# Altium PCB RF_Attenuator.PcbDoc
Units mm, origin at the board's own origin, x right, y up, seen from the top; angles counter-clockwise.
Board outline 49.66 x 26.8 mm, 2 copper layers (Top Layer, Bottom Layer); 25 components, 19 nets, 88 pads, 148 vias.
Unrouted connection lines stored in the file: 2.
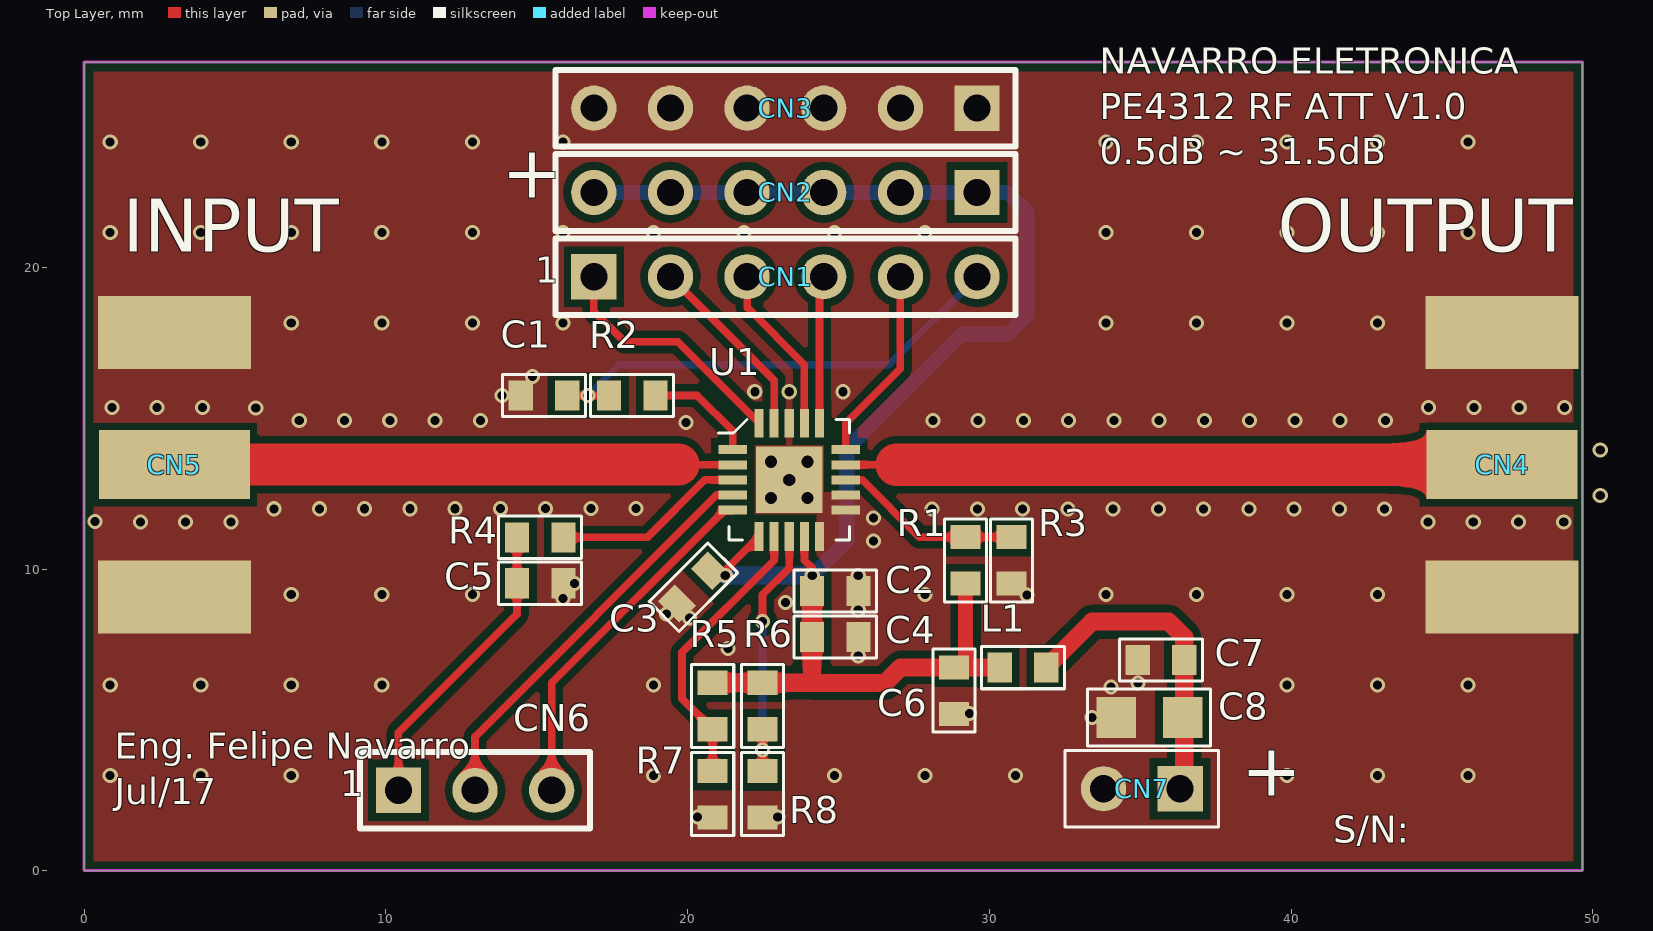
[diagram p0: Top Layer view]
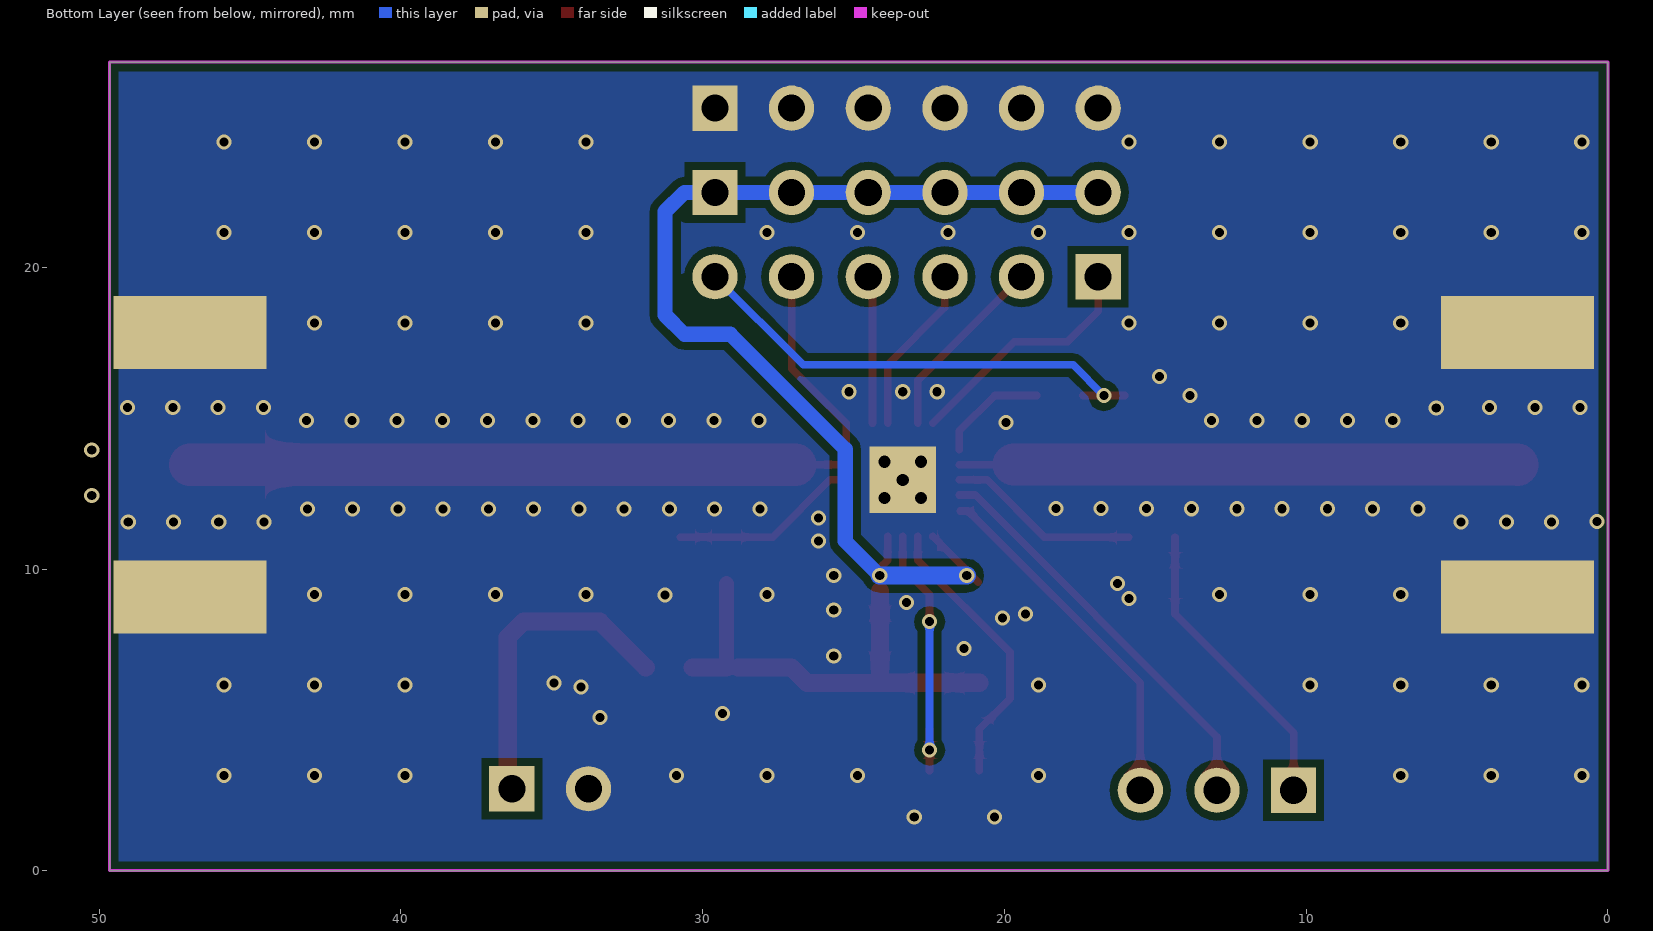
[diagram p1: Bottom Layer view, seen from below]

## Layer stack, top to bottom
Top Solder: solder mask 0.0102, Solder Resist, Dk 3.5
Top Layer: signal copper 0.0356
Dielectric 1: dielectric 0.32, FR-4, Dk 4.8
Bottom Layer: signal copper 0.0356
Bottom Solder: solder mask 0.0102, Solder Resist, Dk 3.5

## Board outline
0,0 0,26.797 49.657,26.797 49.657,0

## Design rules (kind name [scope] priority, off if disabled: settings)
Clearance "Schematic Clearance Constraint_1" [InNet('NetCN4_S')] p1: gap=0.25
Clearance "Schematic Clearance Constraint" [InNet('NetCN5_S')] p2: gap=0.25
Clearance [All] p3: gap=0.254
PolygonConnect [All] p1: connectstyle=Direct reliefconductorwidth=0.254 reliefentries=4 polygonreliefangle="90 Angle" airgapwidth=0.254
RoutingVias [All] p1: holewidth=0.711 width=1.27 viastyle="Through Hole" minholewidth=0.711 minwidth=1.27 maxholewidth=0.711 maxwidth=1.27
SolderMaskExpansion [All] p1: expansion=0.102
Width "Schematic Width Constraint_1" [InNet('NetCN4_S')] p1: maxlimit=1.4 minlimit=1.4 preferedwidth=1.4
Width "Schematic Width Constraint" [InNet('NetCN5_S')] p2: maxlimit=1.4 minlimit=1.4 preferedwidth=1.4
Width [All] p3: maxlimit=6 minlimit=0.254 preferedwidth=0.254
30 further rules are at their usual default settings.

## Components (designator, comment, footprint, x,y, rotation, side; value= is the part's Value field where it differs from the comment)
C1 "Capacitor Cerâmico" CC0603 15.24,15.748 r0 top
C2 "Capacitor Cerâmico" CC0603 24.892,9.271 r180 top
C3 "Capacitor Cerâmico" CC0603 20.193,9.398 r45 top
C4 "Capacitor Cerâmico" CC0603 24.892,7.747 r180 top
C5 "Capacitor Cerâmico" CC0603 15.113,9.525 r180 top
C6 "Capacitor Cerâmico" CC0603 28.829,5.969 r90 top
C7 "Capacitor Cerâmico" CC0603 35.687,6.985 r0 top
C8 "Capacitor Cerâmico" CC0805 35.306,5.08 r0 top
CN1 "Header 6" "CONN HDR1X6" 16.891,19.685 r0 top
CN2 "Header 6" "CONN HDR1X6" 29.591,22.479 r180 top
CN3 "Header 6" "CONN HDR1X6" 29.591,25.273 r180 top
CN4 "Conn SMA EDGE" "CONN SMA EDGE MOUNT" 49.99,13.457 r0 top
CN5 "Conn SMA EDGE" "CONN SMA EDGE MOUNT" -0.01,13.457 r180 top
CN6 "Header 3" "CONN HDR1X3" 10.414,2.667 r0 top
CN7 "Header 2" "CONN HDR1X2" 36.322,2.717 r180 top
L1 "Bead" CC0603 31.115,6.731 r0 top
R1 "Resistor" CC0603 29.21,10.287 r270 top
R2 "Resistor" CC0603 18.161,15.748 r180 top
R3 "Resistor Open" CC0603 30.734,10.287 r90 top
R4 "Resistor" CC0603 15.113,11.049 r0 top
R5 "Resistor" CC0603 20.828,5.461 r90 top
R6 "Resistor" CC0603 22.479,5.461 r90 top
R7 "Resistor Open" CC0603 20.828,2.54 r90 top
R8 "Resistor Open" CC0603 22.479,2.54 r90 top
U1 "PE4312" QFN4X4-20N 23.368,12.954 r0 top

## Footprints (in the part's own frame and the unit in brackets; to place one, negate y for a bottom-side part, rotate by r counter-clockwise, add the part's x,y. Pads: shape width x height; smd on the part's side, far side on the other; paste and mask are expansions set on the pad)
CC0603 [mm] "Chip Resistor, 2-Leads, Body 1,6x0,8mm, IPC Medium Density"
  rect 0.8x1 smd: 1(-0.77,0) 2(0.77,0)
  silkscreen extent -1.38,-0.7 1.38,0.7, body extent -0.8,-0.42 0.8,0.43, height 0.45
CC0805 [mm] "Chip Resistor, 2-Leads, Body 2,0x1,2mm, IPC Medium Density"
  rect 1.3x1.35 smd: 1(-1.1,0) 2(1.1,0)
  silkscreen extent -2.05,-0.95 2.02,0.95, body extent -1,-0.62 1,0.63, height 0.6
"CONN HDR1X2" [mm] "Connector; Header; 2 Position"
  rect 1.5x1.5 hole 0.9: 1(0,0)
  round 1.5 hole 0.9: 2(2.54,0)
  silkscreen extent -1.27,-1.27 3.81,1.27, body extent -1.27,-1.27 3.81,1.27, height 8.49
"CONN HDR1X3" [mm] "Connector; Header; 3 Position"
  rect 1.5x1.5 hole 0.9: 1(0,0)
  round 1.5 hole 0.9: 2(2.54,0) 3(5.08,0)
  silkscreen extent -1.27,-1.27 6.35,1.27, body extent -1.27,-1.27 6.35,1.27, height 8.49
"CONN HDR1X6" [mm] "Connector; Header; 6 Position"
  rect 1.5x1.5 hole 0.9: 1(0,0)
  round 1.5 hole 0.9: 2(2.54,0) 3(5.08,0) 4(7.62,0) 5(10.16,0) 6(12.7,0)
  silkscreen extent -1.27,-1.27 13.97,1.27, body extent -1.27,-1.27 13.97,1.27, height 8.51
"CONN SMA EDGE MOUNT" [mm]
  rect 5.08x2.415 smd: G(-3,-4.383) G(-3,4.383)
  rect 5.08x2.415 smd far side: G(-3,-4.383) G(-3,4.383)
  rect 5x2.29 smd: S(-3,0)
  body extent -5.14,-4.75 9.14,4.78, height 4.36
QFN4X4-20N [mm] "QFN, 20-Leads, Body 4,0x4,0mm (max), Pitch 0,50mm, IPC Medium Density"
  rect 0.95x0.3 smd: 1(-1.875,1) 2(-1.875,0.5) 3(-1.875,0) 4(-1.875,-0.5) 5(-1.875,-1) 11(1.875,-1) 12(1.875,-0.5) 13(1.875,0) 14(1.875,0.5) 15(1.875,1)
  rect 0.3x0.95 smd: 6(-1,-1.875) 7(-0.5,-1.875) 8(0,-1.875) 9(0.5,-1.875) 10(1,-1.875) 16(1,1.875) 17(0.5,1.875) 18(0,1.875) 19(-0.5,1.875) 20(-1,1.875)
  rect 2.2x2.2 all layers, no hole: 21(0,0)
  silkscreen extent -2.35,-2 2,2, body extent -2,-2 2,2, height 1

## Part data
C1 C2 C5: library part "Cap 100pF 100V 0603 NP0", "Capacitor (Semiconductor SIM Model)"
C3: library part "Cap 1nF 50V 0603 NP0", "Capacitor (Semiconductor SIM Model)"
C4 C6 C7: library part "Cap 100nF 50V 0603 X7R", "Capacitor (Semiconductor SIM Model)"
C8: library part "Cap 10uF 25V 0805 X5R", "Capacitor (Semiconductor SIM Model)"
CN1 CN2 CN3: "Header, 6-Pin"
CN4 CN5: "Conector SMA"
CN6: "Header, 3-Pin"
CN7: "Header, 2-Pin"
L1: library part "Bd 1K@100MHz 0603 400mA"
R1 R5 R6: library part "Res 0R 0603 1/10W"
R2 R4: library part "Res 10K 1% 0603 1/10W"
R3 R7 R8: library part "Res Open 0603", "Resistor"
U1: "UltraCMOS® RF Digital Step Attenuator 6-bit, 31.5 dB, 1 MHz–4 GHz"

## Via types
v1: diameter 0.5, hole 0.3, Top Layer to Bottom Layer, tented both sides, 143 vias
v2: diameter 0.6, hole 0.4, Top Layer to Bottom Layer, 5 vias

## Nets (pads, with @x,y where several pads share a name; then routed paths per layer and width w, separated by ;. In a path a pad name is that pad's centre, name@x,y a point inside that pad or via, vN(x,y) a via of type N, cw(c..) or ccw(c..) an arc to the next point about the centre after c; other vN are vias at no path point)
3V3: C2.2 C3.2 C4.2 C6.2 CN2.1 CN2.2 CN2.3 CN2.4 CN2.5 CN2.6 L1.1 R1.2 R5.2 R6.2 U1.6 U1.9 | length 53.1
  Top Layer w0.254: C3.2@20.864,9.561 21.082,9.779 v1(21.245,9.779) 21.245,9.942 21.463,10.16 21.463,10.174 U1.6 ; U1.9 23.868,10.295 24.122,10.041 C2.2
  Top Layer w0.5: C6.2 29.21,6.739 R1.2
  Top Layer w0.6: R5.2 R6.2 24.114,6.231 ; C2.2 C4.2 24.122,6.223 26.543,6.223 27.059,6.739 C6.2 ; C6.2@29.21,6.739 L1.1@30.337,6.739
  Bottom Layer w0.5: CN2.6 CN2.5 CN2.4 CN2.3 CN2.2 CN2.1 30.607,22.479 31.242,21.844 31.242,18.415 30.607,17.78 29.083,17.78 25.273,13.97 25.273,10.922 v1(24.13,9.779)
  Bottom Layer w0.6: v1(21.245,9.779) v1(24.13,9.779)
C0.5: CN1.1 U1.20 | length 8.2
  Top Layer w0.254: CN1.1 16.891,18.542 17.907,17.526 19.671,17.526 U1.20
C1: CN1.2 U1.19 | length 6.3
  Top Layer w0.254: CN1.2 22.868,16.248 U1.19
C2: CN1.3 U1.17 | length 5.6
  Top Layer w0.254: CN1.3 21.971,18.669 23.868,16.772 U1.17
C4: CN1.4 U1.16 | length 4.7
  Top Layer w0.254: U1.16 CN1.4@24.368,19.542
C8: CN1.5 U1.15 | length 6.5
  Top Layer w0.254: U1.15 25.243,14.829 27.051,16.637 CN1.5
C16: R2.1 U1.1 | length 3.7
  Top Layer w0.254: R2.1 20.32,15.748 21.493,14.575 U1.1
CLK: CN6.2 U1.4 | length 13.6
  Top Layer w0.254: CN6.2 12.954,4.445 20.963,12.454 U1.4
DATA: R4.2 U1.3 | length 6.4
  Top Layer w0.254: R4.2 18.669,11.049 20.574,12.954 20.637,12.954 ; 20.641,12.954 U1.3
GND: C1.1 C2.1 C3.1 C4.1 C5.1 C6.1 C7.1 C8.1 CN3.1 CN3.2 CN3.3 CN3.4 CN3.5 CN3.6 CN4.G CN5.G CN7.2 R3.1 R7.1 R8.1 U1.10 U1.11 U1.12 U1.18 U1.21
  other v1: 20.32,1.778 22.987,1.778 0.863,3.155 3.863,3.155 6.863,3.155 18.863,3.155 24.863,3.155 27.863,3.155 30.863,3.155 39.863,3.155 42.863,3.155 45.863,3.155 33.401,5.08 29.337,5.207 34.036,6.096 0.863,6.155 3.863,6.155 6.863,6.155 9.863,6.155 18.863,6.155 39.863,6.155 42.863,6.155 45.863,6.155 34.925,6.223 25.654,7.112 21.336,7.366 20.066,8.382 19.304,8.509 25.654,8.636 23.241,8.89 15.875,9.017 6.863,9.155 9.863,9.155 12.863,9.155 27.863,9.155 31.242,9.144 33.863,9.155 36.863,9.155 39.863,9.155 42.863,9.155 16.256,9.525 25.654,9.779 26.162,10.922 1.86,11.556 3.36,11.556 4.86,11.556 44.536,11.556 46.036,11.556 47.536,11.556 49.036,11.556 0.36,11.573 26.162,11.684 6.294,11.995 7.794,11.996 9.294,11.996 10.794,11.997 12.294,11.997 13.794,11.998 15.294,11.998 16.794,11.999 18.294,11.999 28.102,11.994 29.602,11.994 31.102,11.994 32.602,11.994 34.102,11.994 35.602,11.994 37.102,11.994 38.602,11.994 40.102,11.994 41.602,11.994 43.102,11.994 50.246,12.441 50.246,13.941 19.939,14.859 7.128,14.921 8.628,14.921 10.128,14.922 11.628,14.922 28.126,14.92 29.626,14.92 31.126,14.92 32.626,14.92 34.126,14.92 35.626,14.92 37.126,14.92 38.626,14.92 40.126,14.92 41.626,14.92 43.126,14.92 13.128,14.923 5.686,15.333 0.916,15.358 2.416,15.358 3.916,15.358 44.56,15.358 46.06,15.358 47.56,15.358 49.06,15.358 13.843,15.748 22.225,15.875 23.368,15.875 25.146,15.875 14.859,16.383 6.863,18.155 9.863,18.155 12.863,18.155 15.863,18.155 33.863,18.155 36.863,18.155 39.863,18.155 42.863,18.155 0.863,21.155 3.863,21.155 6.863,21.155 9.863,21.155 12.863,21.155 15.863,21.155 18.863,21.155 21.863,21.155 24.863,21.155 27.863,21.155 33.863,21.155 36.863,21.155 39.863,21.155 42.863,21.155 45.863,21.155 0.863,24.155 3.863,24.155 6.863,24.155 9.863,24.155 12.863,24.155 15.863,24.155 33.863,24.155 36.863,24.155 39.863,24.155 42.863,24.155 45.863,24.155
  other v2: 22.768,12.354 23.968,12.354 23.368,12.954 22.768,13.554 23.968,13.554
LOAD: CN6.3 U1.5 | length 11.9
  Top Layer w0.254: CN6.3 15.494,6.223 21.194,11.923 U1.5@21.462,11.923
MODE: R1.1 R3.2 U1.13 | length 6.3
  Top Layer w0.254: U1.13 25.781,12.954 27.678,11.057 R3.2
NetC1_2: C1.2 CN1.6 R2.2 | length 15.9
  Top Layer w0.254: C1.2 v1(16.701,15.748) R2.2
  Bottom Layer w0.254: v1(16.701,15.748) 17.717,16.764 26.67,16.764 CN1.6
NetC5_2: C5.2 CN6.1 R4.1 | length 10.6
  Top Layer w0.254: CN6.1 10.414,4.572 14.343,8.501 ; C5.2@14.343,9.136 14.343,8.501 ; R4.1 14.343,8.501
NetC7_2: C7.2 C8.2 CN7.1 L1.2 | length 10.3
  Top Layer w0.6: L1.2 33.409,8.255 35.941,8.255 36.457,7.739 C7.2 CN7.1@36.457,2.852
NetCN4_S: CN4.S U1.14 | length 22.1
  Top Layer w0.254: U1.14 27.305,13.462
  Top Layer w1.4: 26.924,13.457 CN4.S
NetCN5_S: CN5.S U1.2 | length 18.8
  Top Layer w0.254: 19.431,13.446 U1.2
  Top Layer w1.4: CN5.S 19.685,13.462
PUP1: R5.1 R7.2 U1.7 | length 9.5
  Top Layer w0.254: R7.2 R5.1 19.812,5.707 19.812,7.239 22.868,10.295 U1.7
PUP2: R6.1 R8.2 U1.8 | length 8.8
  Top Layer w0.254: R8.2 v1(22.479,4) R6.1 ; v1(22.479,8.255) 22.479,9.144 23.368,10.033 U1.8
  Bottom Layer w0.254: v1(22.479,4) v1(22.479,8.255)

## Polygon pours and split planes (outlines as drawn)
GND on Bottom Layer "Top Layer-No Net" (solid, remove dead copper, pour order 0): 0,0 0,26.797 0.254,26.797 49.657,26.797 49.657,0
GND on Top Layer "Top Layer-No Net" (solid, remove dead copper, pour order 4): 0,0 0,26.797 0.254,26.797 49.657,26.797 49.657,0

## Keep-outs
Keep-Out Layer:
  the board outline again, w0.1

## Silkscreen, mask and mechanical layers (free items; w line width, h text height)
Top Overlay:
  text "NAVARRO ELETRONICA / PE4312 RF ATT V1.0 / 0.5dB ~ 31.5dB" at 33.655,23.114 h1.5
  text "+" at 13.843,21.717 h3
  text "INPUT" at 1.27,19.939 h3
  text "OUTPUT" at 39.565,19.939 h3
  text "Eng. Felipe Navarro / Jul/17" at 1.016,1.905 h1.5
  text "+" at 38.354,1.905 h3
  text "S/N:" at 41.402,0.635 h1.52
Mechanical 29:
  lines w0.1: 0,0 0,4.064 0,26.797 49.657,26.797 49.657,0 0,0

## Text inside footprints (layer, text, board x,y; h text height)
CN1: Top Overlay "1" at 14.956,19.189 h1.5
CN6: Top Overlay "1" at 8.479,2.171 h1.5